# EAGLE board B (EAGLE 7.5.0)
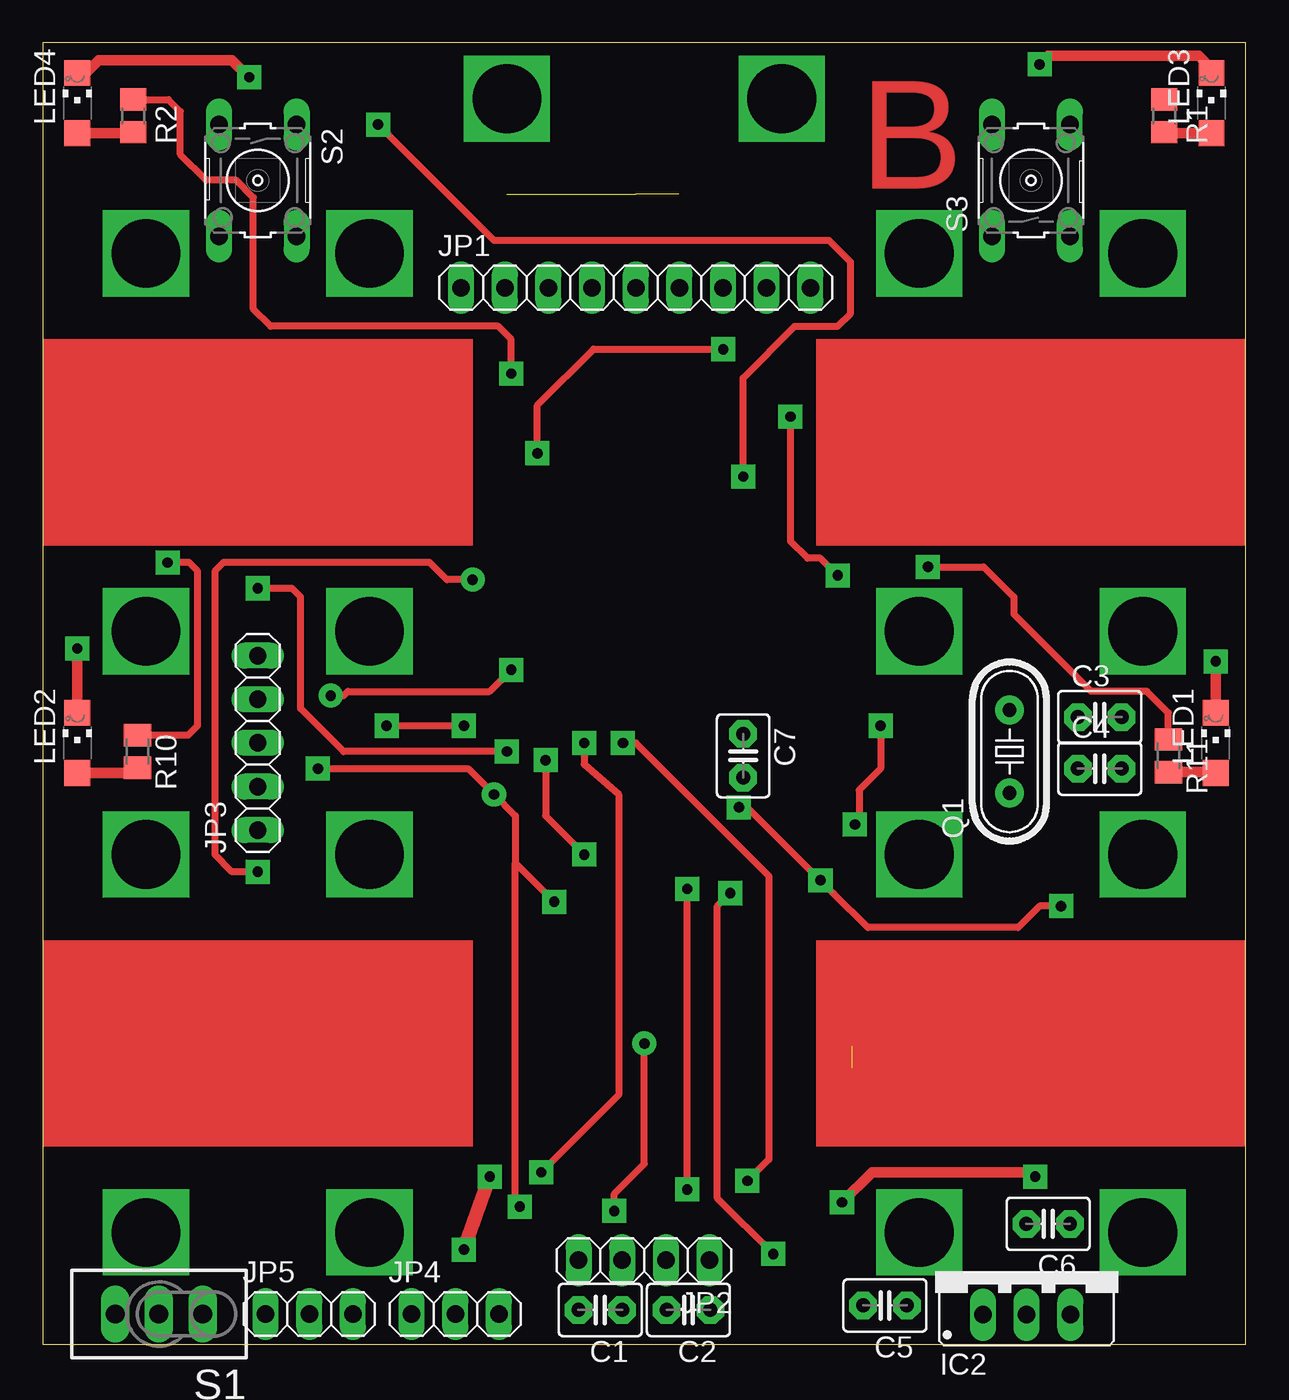
[diagram p0: board, top side]
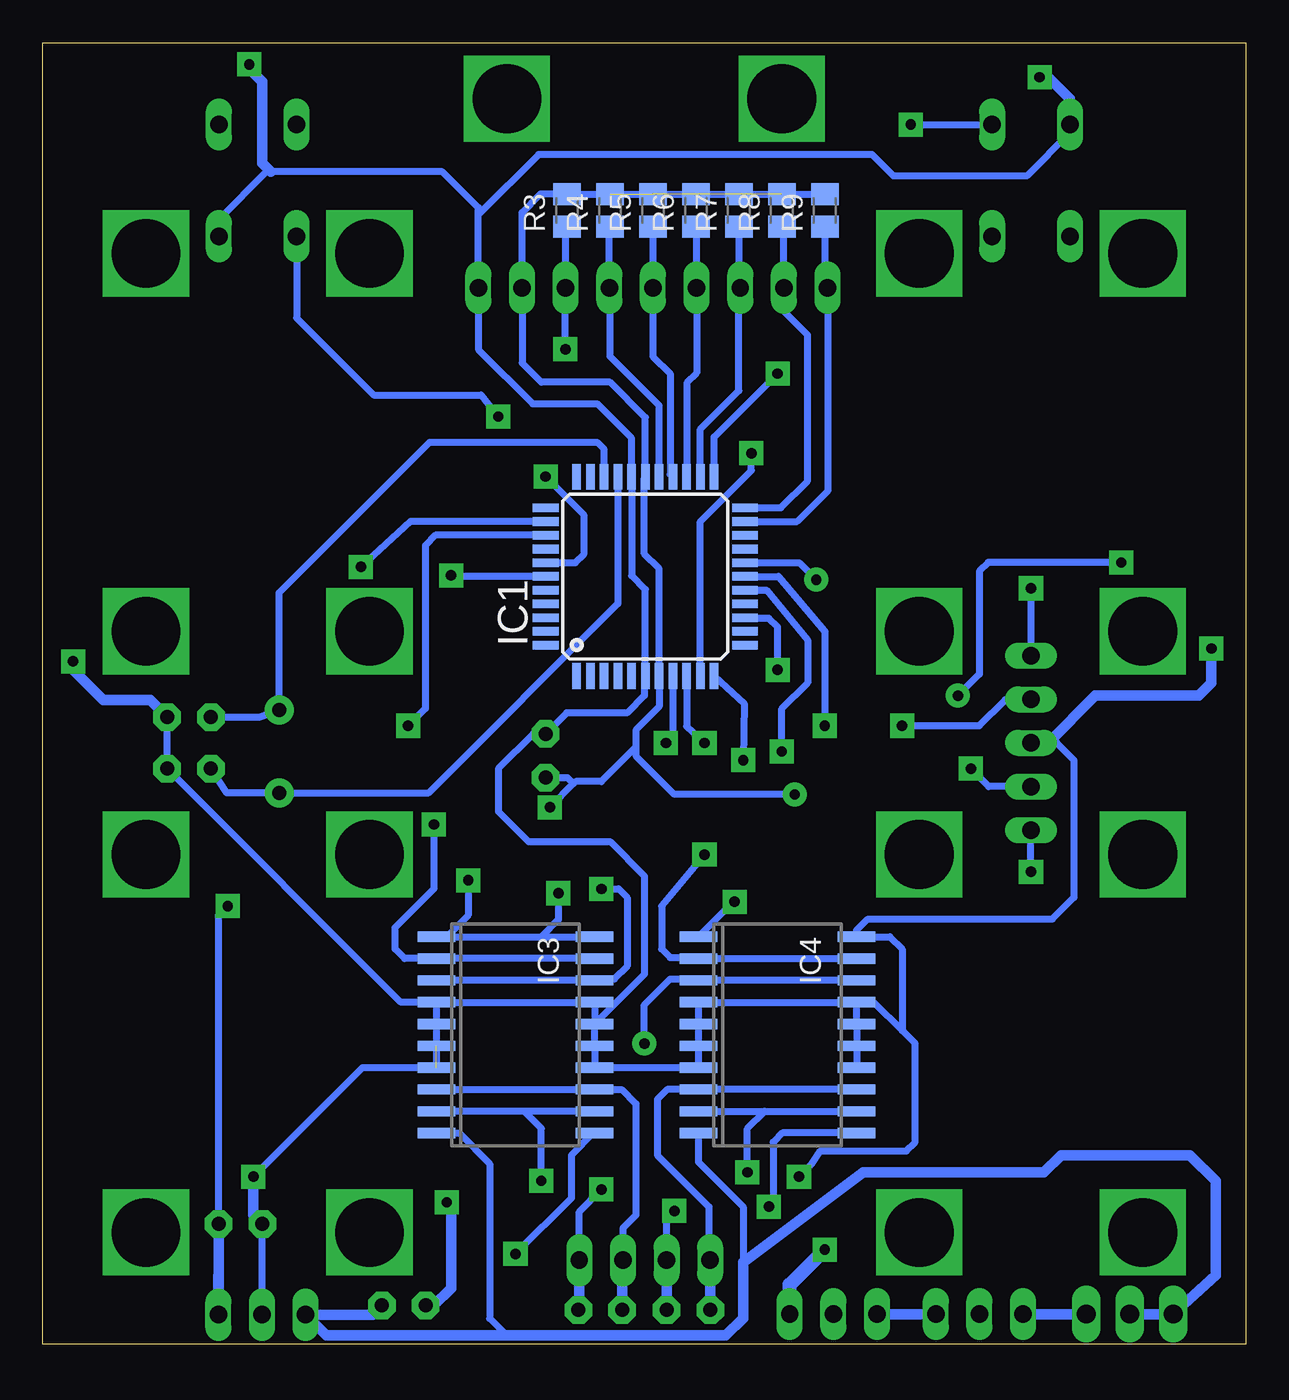
[diagram p1: board, bottom side, seen from below]

Size 70 x 75.75 mm. Coordinates in mm from the lower left corner, seen from the top.
Outline: 70,0 70,75.75 0,75.75 0,0 70,0
Copper layers (1*16): Top 0.035mm / dielectric 1.5mm / Bottom 0.035mm
Design rules "default *": minimum track width 10mil, minimum drill 24mil, track to track 8mil, track to pad 8mil, pad to pad 8mil, via to via 8mil, smd to smd 8mil, copper to edge 40mil, drill to drill 8mil, minimum pad ring 10mil, minimum via ring 0.4mm, stop-mask expansion 4mil, vias tented up to drill 0mil, thermal gap 10mil

## Footprints (pad centres in the part's own frame; a part is rotated, then mirrored left to right if it is on the bottom)
C2.5-3 = drill 0.813 pad 1.6 octagon: 1 -1.27,0; 2 1.27,0
TQFP44 = smd 1.5 x 0.5: 1 -5.8,4; 2 -5.8,3.2; 3 -5.8,2.4; 4 -5.8,1.6; 5 -5.8,0.8; 6 -5.8,0; 7 -5.8,-0.8; 8 -5.8,-1.6; 9 -5.8,-2.4; 10 -5.8,-3.2; 11 -5.8,-4; 23 5.8,-4; 24 5.8,-3.2; 25 5.8,-2.4; 26 5.8,-1.6; 27 5.8,-0.8; 28 5.8,0; 29 5.8,0.8; 30 5.8,1.6; 31 5.8,2.4; 32 5.8,3.2; 33 5.8,4 | smd 0.5 x 1.5: 12 -4,-5.8; 13 -3.2,-5.8; 14 -2.4,-5.8; 15 -1.6,-5.8; 16 -0.8,-5.8; 17 0,-5.8; 18 0.8,-5.8; 19 1.6,-5.8; 20 2.4,-5.8; 21 3.2,-5.8; 22 4,-5.8; 34 4,5.8; 35 3.2,5.8; 36 2.4,5.8; 37 1.6,5.8; 38 0.8,5.8; 39 0,5.8; 40 -0.8,5.8; 41 -1.6,5.8; 42 -2.4,5.8; 43 -3.2,5.8; 44 -4,5.8
78XXS = drill 1.016 long: GND 0,-2.54; IN -2.54,-2.54; OUT 2.54,-2.54
SO20 = smd 0.6 x 2.2: 1 -5.715,-4.6; 2 -4.445,-4.6; 3 -3.175,-4.6; 4 -1.905,-4.6; 5 -0.635,-4.6; 6 0.635,-4.6; 7 1.905,-4.6; 8 3.175,-4.6; 9 4.445,-4.6; 10 5.715,-4.6; 11 5.715,4.6; 12 4.445,4.6; 13 3.175,4.6; 14 1.905,4.6; 15 0.635,4.6; 16 -0.635,4.6; 17 -1.905,4.6; 18 -3.175,4.6; 19 -4.445,4.6; 20 -5.715,4.6
1X09 = drill 1.016 long: 1 -10.16,0; 2 -7.62,0; 3 -5.08,0; 4 -2.54,0; 5 0,0; 6 2.54,0; 7 5.08,0; 8 7.62,0; 9 10.16,0
1X04 = drill 1.016 long: 1 -3.81,0; 2 -1.27,0; 3 1.27,0; 4 3.81,0
1X05 = drill 1.016 long: 1 -5.08,0; 2 -2.54,0; 3 0,0; 4 2.54,0; 5 5.08,0
1X03 = drill 1.016 long: 1 -2.54,0; 2 0,0; 3 2.54,0
CHIPLED_1206 = smd 1.5 x 1.5: A 0,-1.75; C 0,1.75
HC49/S = drill 0.813 pad 1.676: 1 -2.413,0; 2 2.413,0
R0805 = smd 1.3 x 1.5: 1 -0.95,0; 2 0.95,0
M0805 = smd 1.3 x 1.6: 1 -0.95,0; 2 0.95,0
TL3XPO = drill 1.1 pad 1.422 long: 1 -2.54,0; 2 0,0; 3 2.54,0
B3F-10XX = drill 1.016 long: 1 -3.251,2.261; 2 3.251,2.261; 3 -3.251,-2.261; 4 3.251,-2.261

## Placement (x,y rotation side)
C1  [C2.5-3]  32.44,1.99 180 top
C2  [C2.5-3]  37.57,1.99 180 top
C3  [C2.5-3]  61.5,36.5 0 top
C4  [C2.5-3]  61.5,33.5 0 top
C5  [C2.5-3]  49,2.25 180 top
C6  [C2.5-3]  58.5,7 180 top
C7  [C2.5-3]  40.75,34.25 270 top
IC1  PIC18F4455_TQFP  [TQFP44]  34.94,44.69 90 bottom
IC2  [78XXS]  57.25,4.25 0 top
IC3  L293DD  [SO20]  42.5,18 270 bottom
IC4  L293DD  [SO20]  27.25,18 270 bottom
JP1  [1X09]  34.5,61.5 0 top
JP2  [1X04]  34.98,4.88 180 top
JP3  [1X05]  12.5,35 90 top
JP4  [1X03]  24,1.75 0 top
JP5  [1X03]  15.5,1.75 0 top
LED1  [CHIPLED_1206]  68.25,35 0 top
LED2  [CHIPLED_1206]  2,35 0 top
LED3  [CHIPLED_1206]  68,72.25 0 top
LED4  [CHIPLED_1206]  2,72.25 0 top
Q1  [HC49/S]  56.25,34.5 90 top
R1  [R0805]  65.25,71.5 270 top
R2  [R0805]  5.25,71.5 270 top
R3  [M0805]  39.5,66 90 bottom
R4  [M0805]  37,66 90 bottom
R5  [M0805]  34.5,66 90 bottom
R6  [M0805]  32,66 90 bottom
R7  [M0805]  29.5,66 90 bottom
R8  [M0805]  27,66 90 bottom
R9  [M0805]  24.5,66 90 bottom
R10  [M0805]  5.5,34.5 270 top
R11  [M0805]  65.5,34.25 270 top
S1  TL39PO  [TL3XPO]  6.75,1.75 180 top
S2  [B3F-10XX]  12.5,67.75 270 top
S3  [B3F-10XX]  57.5,67.75 90 top

## Library data of the parts
C1-C7 = capacitor-wima
IC1 = microchip; MF: MICROCHIP; MPN: PIC18F4455-I/PT; OC_FARNELL: 9321322; OC_NEWARK: 08J9628
IC2 = v-reg
IC3 IC4 = st-microelectronics; OC_FARNELL: unknown
JP1-JP5 = pinhead
LED1-LED4 R10 R11 = adafruit
Q1 = crystal; OC_FARNELL: 1667008; OC_NEWARK: unknown
R1-R9 = resistor
S1 = switch
S2 S3 = switch-omron; MPN: B3F-1000; OC_FARNELL: 176432; OC_NEWARK: 36M3542

## Nets
5V: C6.1 C7.2 IC1.7 IC1.28 IC2.OUT IC3.1 IC3.11 IC3.20 IC4.1 IC4.11 JP1.8 JP3.2 R3.2 R4.2 R5.2 R6.2 R7.2 R8.2 R9.2
B0: IC1.38 S2.1
B1: IC1.39 S3.1
GND: C3.2 C4.2 C5.2 C6.2 C7.1 IC1.6 IC1.29 IC2.GND IC3.4 IC3.5 IC3.6 IC3.7 IC3.14 IC3.15 IC3.16 IC3.17 IC4.4 IC4.5 IC4.6 IC4.7 IC4.14 IC4.15 IC4.16 IC4.17 IC4.20 JP1.9 JP3.3 JP4.3 LED1.C LED2.C LED3.C LED4.C S2.3 S3.3
I1: IC1.36 IC3.2 IC3.19
I2: IC1.8 IC3.9 IC3.12
I3: IC1.11 IC4.2 IC4.19
I4: IC1.9 IC4.9 IC4.12
LED_A: IC1.14 R10.1
LED_B: IC1.35 R11.1
LED_D: IC1.23 R2.1
MCRL: IC1.18 JP3.1
N$17: C4.1 IC1.30 Q1.1
N$18: C3.1 IC1.31 Q1.2
N$19: JP4.1 JP5.3
N$20: LED2.A R10.2
N$21: LED1.A R11.2
N$24: LED3.A R1.2
N$25: LED4.A R2.2
OUT1: C2.1 IC3.3 IC3.18 JP2.1
OUT2: C2.2 IC3.8 IC3.13 JP2.2
OUT3: C1.1 IC4.3 IC4.18 JP2.3
OUT4: C1.2 IC4.8 IC4.13 JP2.4
PGC: IC1.16 JP3.5
PGD: IC1.17 JP3.4
S0: IC1.21 JP1.1 R9.1
S1: IC1.22 JP1.2 R8.1
S2: IC1.24 JP1.3 R7.1
S3: IC1.25 JP1.4 R6.1
S4: IC1.26 JP1.5 R5.1
S5: IC1.27 JP1.6 R4.1
S6: IC1.10 JP1.7 R3.1
SA: IC1.19
SB: IC1.20
VPOWER: C5.1 IC2.IN IC3.10 IC4.10 S1.2
VPREV: JP5.1 S1.1

## Tracks (layer width: path | path; a pad name or v marks a point on that pad's centre or on a via)
5V  (via drill 0.6)  (4 unrouted)
  Top 0.406: v16,33.5 24.75,33.5 v26.25,32 27.5,30.75 27.5,28 | v59.25,25.5 58,25.5 56.75,24.25 48,24.25 46,26.25 v45.25,27 41,31.25 v40.5,31.25 | v27.75,8 27.5,8.25 27.5,28 | 27.5,28 v29.75,25.75 | v42.5,5.25 39.25,8.5 39.25,25.5 v40,26.25
  Bottom 0.406: R9.2 R4.2 R3.2 41.05,66.95 42.12,65.88 JP1.8 42.12,57.12 41,56 37,56 34.94,53.94 IC1.28 35,50.43 35,46 34.14,45.14 IC1.7 34.14,37.11 35.5,35.75 35.5,34.75 | JP3.2 14.96,32.46 v16,33.5 | v26.25,32 33.25,32 35.5,34.25 35.5,34.75 | 59.79,6.98 C6.1 59.77,24.98 v59.25,25.5 | IC3.1 46.5,23.71 | 46.5,23.71 41,23.71 | 41,23.71 IC3.20 | v45.25,27 45.25,24.96 46.5,23.71 | IC4.11 26.96,12.29 27.5,11.75 27.5,8.25 v27.75,8 | IC3.11 37.97,12.29 39.25,11 39.25,8.5 v42.5,5.25 | v40,26.25 40,24.71 41,23.71 | v29.75,25.75 29.82,25.75 IC4.1 | 35.5,34.75 37.5,32.75 39,32.75 39.12,32.62 | 39.12,32.62 v40.5,31.25 | C7.2 39.48,32.98 39.12,32.62
  Bottom 0.61: C6.1 59.77,4 | 59.77,4 59.77,3.23 | IC2.OUT 59.79,3.98 59.77,4
B0  (via drill 0.6)
  Top 0.406: v40.75,50.5 40.75,56.25 43.75,59.25 46.25,59.25 47,60 47,63 45.75,64.25 26.25,64.25 v19.5,71
  Bottom 0.406: IC1.38 39.01,45.49 38.5,46 38.5,48.25 v40.75,50.5 | v19.5,71 S2.1
B1  (via drill 0.6)
  Top 0.406: v43.5,54 43.5,46.75 44.5,45.75 45.25,45.75 v46.25,44.75
  Bottom 0.406: S3.1 55.24,59.74 50.75,55.25 44.5,55.25 v43.5,54 | IC1.39 46.19,44.69 v46.25,44.75
GND  (via drill 0.6)  (1 unrouted)
  Top 0.61: v46.5,8.25 48.25,10 57.5,10 v57.75,9.75 | LED1.C v68.25,39.75 | LED2.C v2,40.5 | LED4.C 2.5,74 3.25,74.75 11,74.75 v12,73.75 | LED3.C 68,74.25 67.25,75 58.5,75 v58,74.5
  Top 0.813: v24.5,5.5 v26,9.75
  Bottom 0.406: C3.2 C4.2 49.17,19.91 IC3.4 | JP3.3 11.5,35 11,35 10,34 10,26 11.25,24.75 22,24.75 22.65,24.1 IC4.20 20.71,23.71 20,23 20,18.25 | IC2.GND 57.25,6.98 C6.2 | 44.66,65.75 JP1.9 44.66,57.91 41.5,54.75 37.75,54.75 35.74,52.74 IC1.29 35.74,44.74 34.94,43.94 IC1.6 34.94,38.81 35,38.75 35,37.75 36,36.75 39.52,36.75 C7.1 41.48,35.52 43.5,33.5 43.5,31 41.75,29.25 37,29.25 35,27.25 35,21.54 IC3.16 | 44.66,65.75 44.66,66.16 46.75,68.25 56.75,68.25 57,68.25 59.75,65.5 S3.3 | S2.3 10.24,70.51 12.75,68 20.5,68 21.75,69.25 41.16,69.25 44.66,65.75 | IC3.4 IC3.5 IC3.7 51.41,16.09 v57.75,9.75 | IC4.17 IC4.4 IC4.5 IC4.6 IC4.7 IC3.14 IC3.15 IC3.16 | IC3.16 IC3.17 IC3.4 | v26,9.75 25.25,10.5 24.75,11.25 19.75,11.25 19.25,11.75 19.25,17.5 20,18.25 | IC4.17 21.66,19.91 20,18.25 | IC4.14 IC4.15 IC4.16 IC4.17
  Bottom 0.61: C5.2 47.25,2.25 46.25,3.25 46.25,8 v46.5,8.25 | v57.75,9.75 57.75,7.52 C6.2 | v68.25,39.75 68.25,39.25 66.5,37.5 63.77,37.5 C3.2 | v2,40.5 2,38.5 2.75,37.75 8.75,37.75 11.5,35 | v12,73.75 11.5,73.75 10.25,72.5 10.25,71.01 S2.3 | v58,74.5 58.25,74.5 57.25,73.5 57.25,68.75 56.75,68.25
  Bottom 0.813: JP4.3 26.54,3.46 v24.5,5.5
I1  (via drill 0.6)
  Top 0.406: v48.75,36 48.75,33.5 47.5,32.25 47.5,30.5 v47.25,30.25
  Bottom 0.406: IC3.19 IC3.2 48.95,22.45 49.5,23 49.5,24.25 47.25,26.5 v47.25,30.25 | IC1.36 47.16,47.09 47.75,46.5 47.75,37 v48.75,36
I2  (via drill 0.6)
  Top 0.406: v33.75,35 34.5,35 42.25,27.25 42.25,10.75 v41,9.5
  Bottom 0.406: IC3.12 42,13.55 | 42,13.55 IC3.9 | IC1.8 33.34,35.41 v33.75,35 | v41,9.5 41,12.55 42,13.55
I3  (via drill 0.6)
  Top 0.406: v29.25,34 29.25,30.75 v31.5,28.5
  Bottom 0.406: IC4.19 IC4.2 31.91,22.5 33.5,22.5 34,23 34,25.5 v31.5,28.5 | IC1.11 29.19,37.31 v29.25,34
I4  (via drill 0.6)
  Top 0.406: v31.5,35 31.5,33.75 33.5,32 33.5,14.5 v29,10
  Bottom 0.406: IC4.9 28,13.55 | 28,13.55 IC4.12 | IC1.9 32.54,35.96 v31.5,35 | v29,10 29,12.55 28,13.55
LED_A  (via drill 0.6)
  Top 0.406: R10.1 8.45,35.45 9,36 9,45 8.5,45.5 v7.25,45.5 | v16.75,37.75 17.5,37.75 17.75,38 26,38 v27.25,39.25
  Bottom 0.406: v7.25,45.5 15,45.5 15.5,45 15.5,39 v16.75,37.75 | v27.25,39.25 27.25,41.75 27.75,42.25 29.1,42.25 IC1.14
LED_B  (via drill 0.6)
  Top 0.406: R11.1 65.5,36.75 64.25,38 61,38 56.5,42.5 56.5,43.5 54.75,45.25 v51.5,45.25
  Bottom 0.406: IC1.35 48.61,47.89 v51.5,45.25
LED_D  (via drill 0.6)
  Top 0.406: v27.25,56.5 27.25,58.5 26.5,59.25 13.25,59.25 12.25,60.25 12.25,66.75 11.25,67.75 9.5,67.75 8,69.25 8,71.75 7.3,72.45 R2.1
  Bottom 0.406: IC1.23 30.94,52.81 v27.25,56.5
MCRL  (via drill 0.6)
  Top 0.406: v25,44.5 23.5,44.5 22.5,45.5 10.5,45.5 10,45 10,28.5 11,27.5 v12.5,27.5
  Bottom 0.406: IC1.18 25.99,45.49 v25,44.5 | v12.5,27.5 JP3.1
N$1  (via drill 4)
  other vias: 19,63.5
N$2  (via drill 4)
  other vias: 6,63.5
N$3  (via drill 4)
  other vias: 6,28.5
N$4  (via drill 4)
  other vias: 6,6.5
N$5  (via drill 4)
  other vias: 19,41.5
N$6  (via drill 4)
  other vias: 6,41.5
N$7  (via drill 4)
  other vias: 19,6.5
N$8  (via drill 4)
  other vias: 19,28.5
N$9  (via drill 4)
  other vias: 51,63.5
N$10  (via drill 4)
  other vias: 64,63.5
N$11  (via drill 4)
  other vias: 51,41.5
N$12  (via drill 4)
  other vias: 64,41.5
N$13  (via drill 4)
  other vias: 51,28.5
N$14  (via drill 4)
  other vias: 51,6.5
N$15  (via drill 4)
  other vias: 64,6.5
N$16  (via drill 4)
  other vias: 64,28.5
N$17
  Bottom 0.406: C4.1 59.32,32.09 Q1.1 47.56,32.09 36.54,43.1 IC1.30
N$18
  Bottom 0.406: C3.1 57.41,36.5 Q1.2 56.25,43.75 47.5,52.5 37.75,52.5 37.34,52.09 IC1.31
N$19
  Bottom 0.61: JP5.3 JP4.1
N$20
  Top 0.61: LED2.A 4.95,33.25 R10.2
N$21
  Top 0.61: R11.2 68.2,33.3 LED1.A
N$22  (via drill 4)
  other vias: 27,72.5
N$23  (via drill 4)
  other vias: 43,72.5
N$24
  Top 0.61: LED3.A 65.3,70.5 R1.2
N$25
  Top 0.61: LED4.A 5.2,70.5 R2.2
OUT1  (via drill 0.6)
  Top 0.406: v37.5,9 v37.5,26.5
  Bottom 0.406: IC3.3 IC3.18 37.83,21.25 36.75,21.25 36,22 36,26 36.5,26.5 v37.5,26.5 | JP2.1 38.79,7.71 v37.5,9
  Bottom 0.61: JP2.1 38.79,2.79 C2.1
OUT2
  Bottom 0.406: IC3.8 IC3.13 36.33,14.82 35.5,14 35.5,7.5 36.25,6.75 JP2.2
  Bottom 0.61: C2.2 36.3,5.34 JP2.2
OUT3  (via drill 0.6)
  Top 0.406: v33.25,7.75 33.25,8.75 35,10.5 v35,17.5
  Bottom 0.406: IC4.18 IC4.3 31.93,21.25 33.5,21.25 35,19.75 v35,17.5 | JP2.3 33.71,7.29 v33.25,7.75
  Bottom 0.61: C1.1 JP2.3
OUT4
  Bottom 0.406: IC4.13 IC4.8 33.67,14.82 34.25,14.25 34.25,11 31.25,8 31.25,4.96 JP2.4
  Bottom 0.61: JP2.4 C1.2
PGC  (via drill 0.6)
  Top 0.406: v27,34.5 17.5,34.5 15,37 15,43.5 14.5,44 v12.5,44
  Bottom 0.406: IC1.16 27.89,43.89 25.5,41 25.5,38.5 27,37 v27,34.5 | v12.5,44 JP3.5
PGD  (via drill 0.6)
  Top 0.406: v20,36 v24.5,36
  Bottom 0.406: IC1.17 27.19,44.69 24.5,41.5 v24.5,36 | v20,36 15.5,36 14,37.5 12.54,37.5 JP3.4
S0
  Bottom 0.406: IC1.21 26.11,47.89 24.34,49.66 JP1.1 24.5,61.66 R9.1
S1
  Bottom 0.406: R8.1 26.88,64.93 JP1.2 26.88,60.13 26.5,59.75 25.75,59 25.5,58.75 25.5,50.25 27.06,48.69 IC1.22
S2
  Bottom 0.406: IC1.24 31.74,53.26 29.5,55.5 29.5,61.42 JP1.3 29.5,61.58 R7.1
S3
  Bottom 0.406: IC1.25 32.54,50.96 32.5,51 32.5,56 31.96,56.54 JP1.4 31.96,65.01 R6.1
S4
  Bottom 0.406: IC1.26 33.5,50.65 33.5,56.5 34.5,57.5 JP1.5 R5.1
S5
  Bottom 0.406: IC1.27 34.14,54.64 37,57.5 37,61.46 JP1.6 37.04,65.01 R4.1
S6  (via drill 0.6)
  Top 0.406: v28.77,51.86 28.77,54.66 32.05,57.93 39.58,57.93 v39.59,57.92
  Bottom 0.406: R3.1 39.58,64.97 JP1.7 39.59,61.49 v39.59,57.92 | IC1.10 31.74,47.89 28.77,50.86 28.77,51.61 v28.77,51.86
VPOWER
  Bottom 0.406: IC4.10 31.85,10.6 29.25,8 29.25,4.75 | IC3.10 45.78,12.29 44,10.5 44,1.5 43,0.5
  Bottom 0.61: C5.1 50.81,1.71 IC2.IN 53.5,0.5 43,0.5 30.25,0.5 29.25,1.5 29.25,4.75 22.25,10 11.75,10 10.75,11 3.25,11 1.75,9.5 1.75,4 4.25,1.75 S1.2
VPREV
  Bottom 0.61: JP5.1 S1.1
(copper drawn outside any net)
  shapes: Top area x4

## Text on the board
Top: B